# Altium PCB PCB1.PcbDoc
Units mil, origin at the board's own origin, x right, y up, seen from the top; angles counter-clockwise.
Board outline 1579.83 x 2288.5 mil, 2 copper layers (Top Layer, Bottom Layer); 80 components, 49 nets, 228 pads, 100 vias.
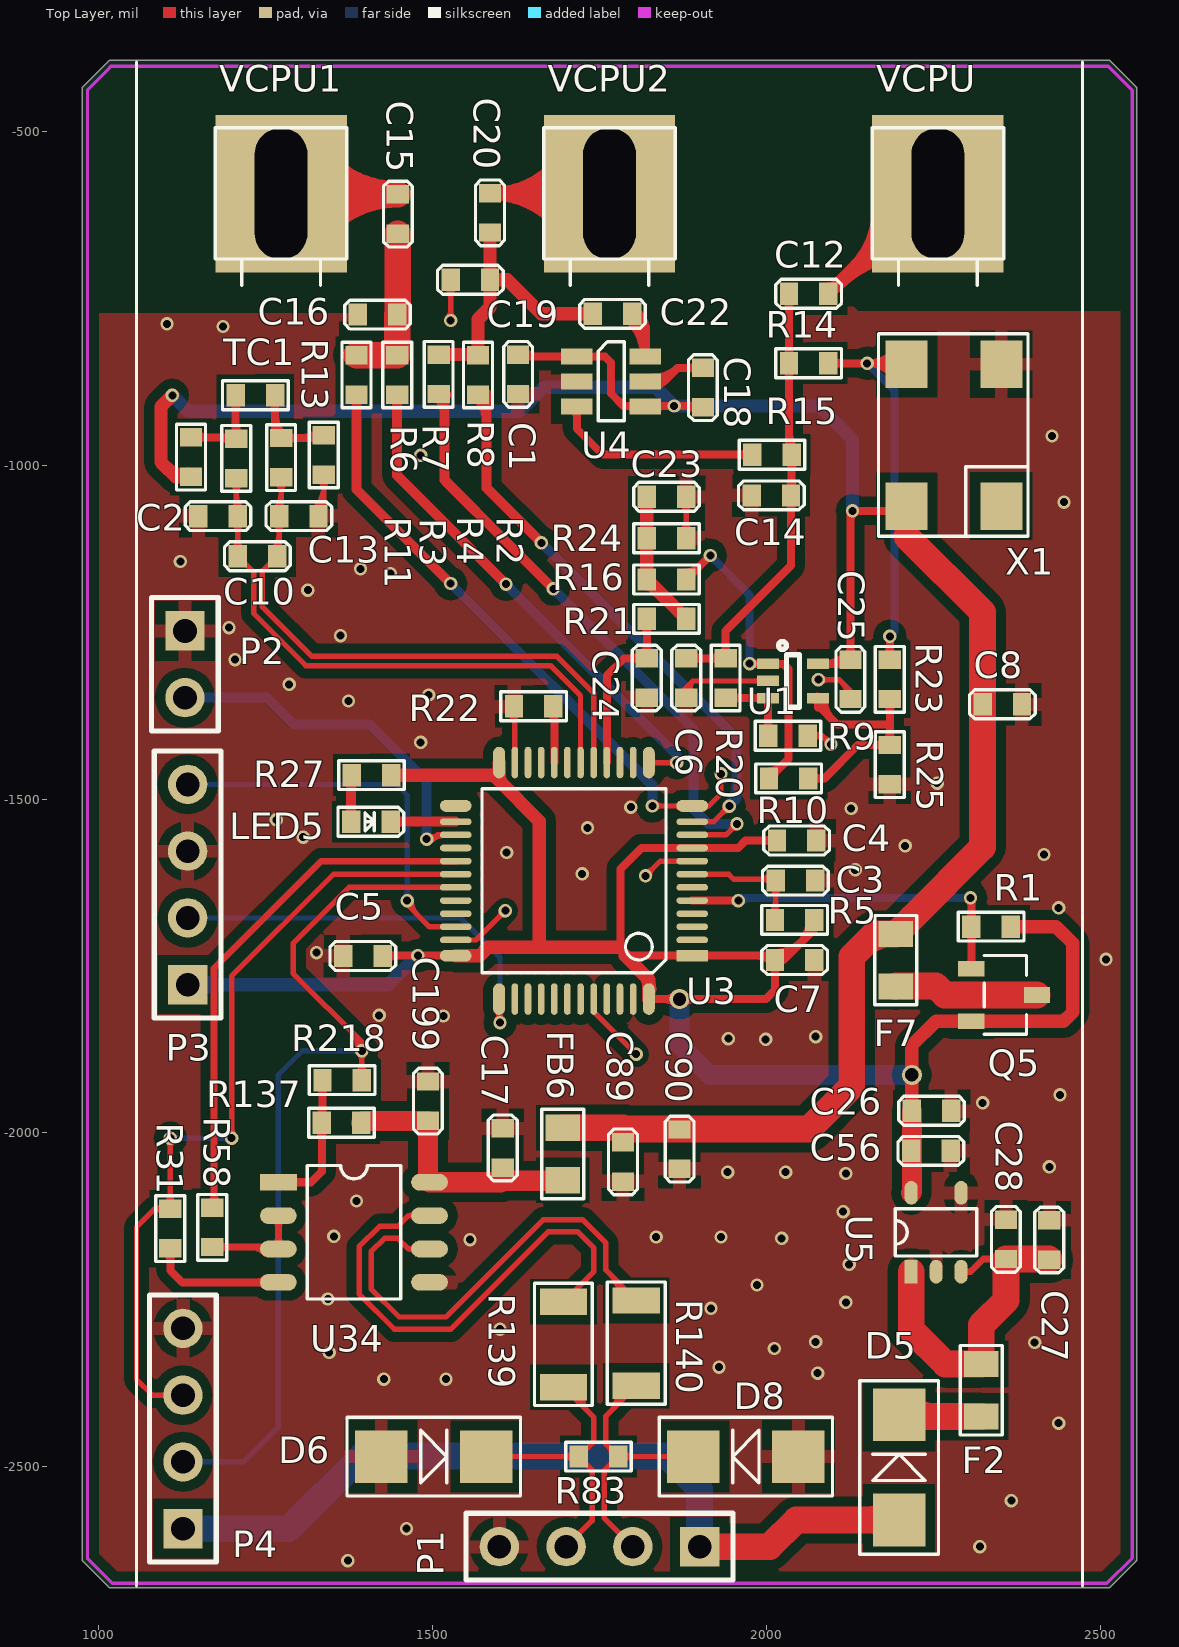
[diagram p0: Top Layer view]
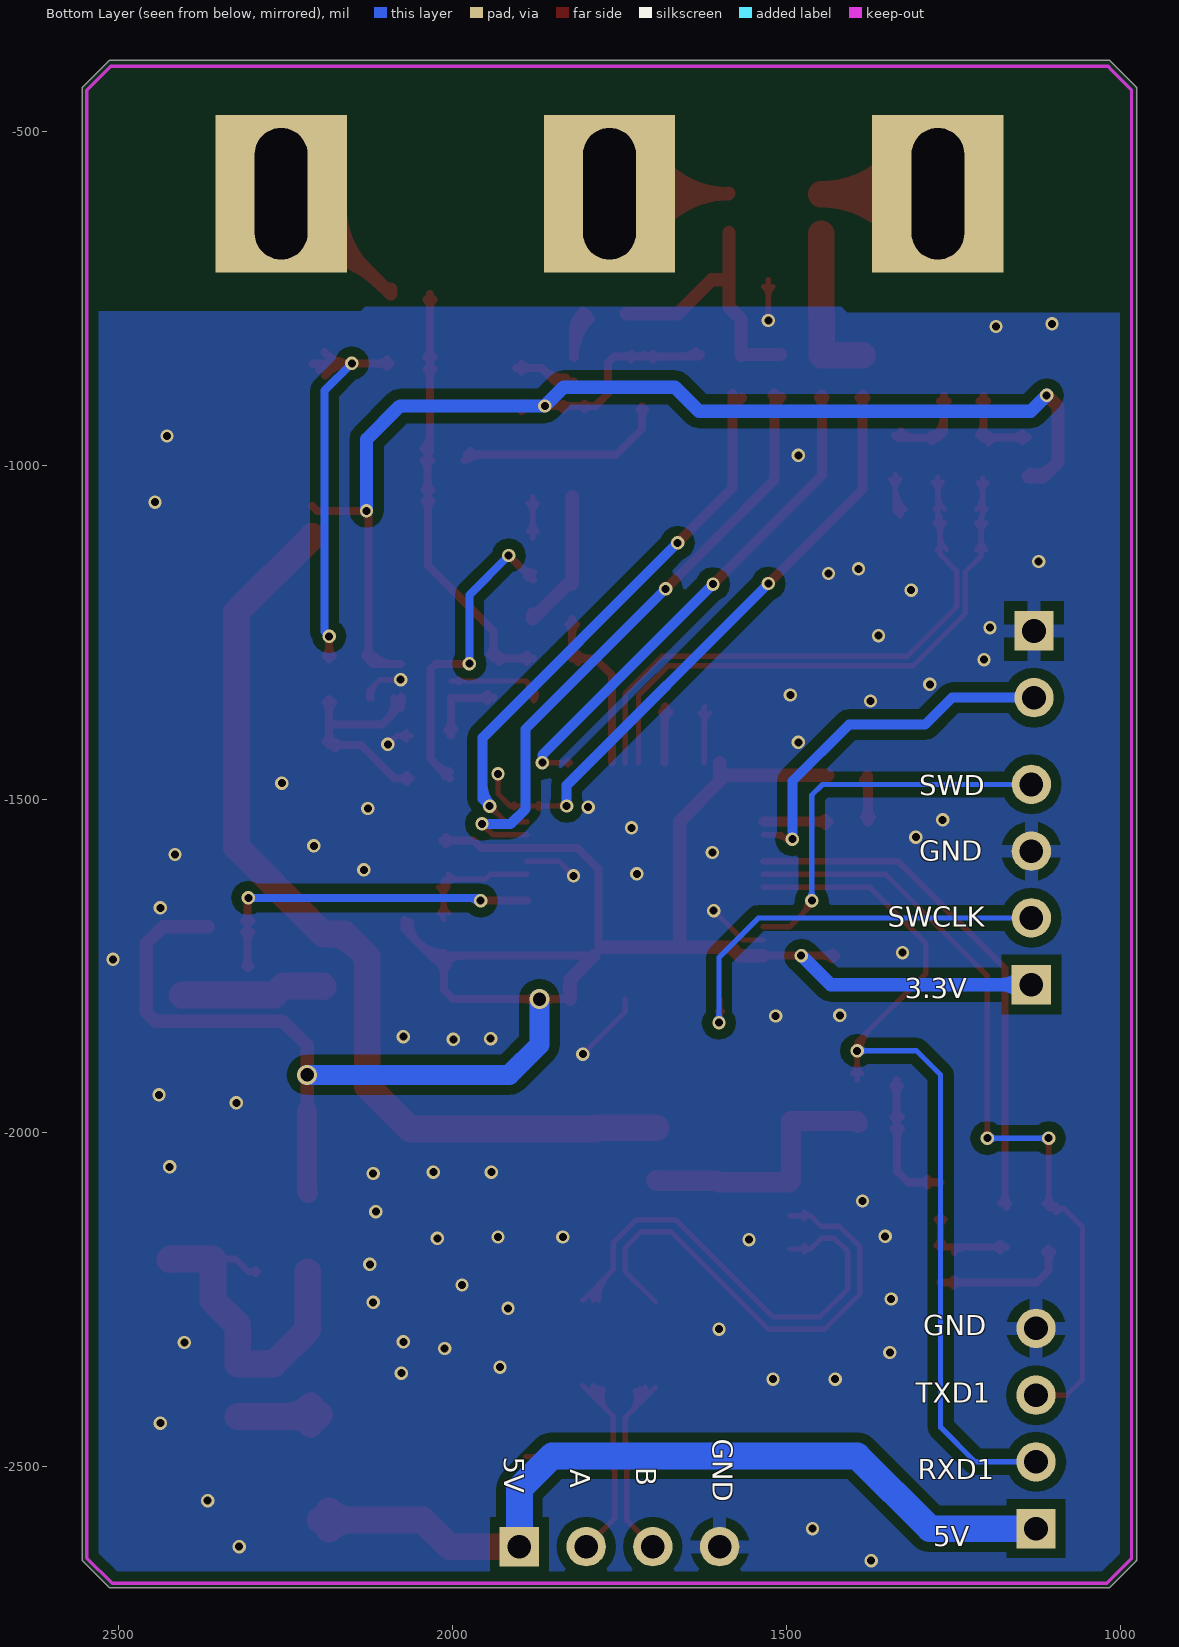
[diagram p1: Bottom Layer view, seen from below]

## Layer stack, top to bottom
Top Layer: signal copper 1.4
Dielectric: dielectric 12.6, FR-4, Dk 4.8
Bottom Layer: signal copper 1.4

## Board outline
975.11,-2639.63 ccw(c977.63,-2639.63) 975.85,-2641.41 1015.22,-2680.78 ccw(c1017,-2679) 1017,-2681.52 2513.06,-2681.52 ccw(c2513.06,-2679) 2514.84,-2680.78 2554.21,-2641.41 ccw(c2552.43,-2639.63) 2554.95,-2639.63 2554.95,-434.9 ccw(c2552.43,-434.9) 2554.21,-433.13 2514.84,-393.76 ccw(c2513.06,-395.53) 2513.06,-393.02 1017,-393.02 ccw(c1017,-395.53) 1015.22,-393.76 975.85,-433.13 ccw(c977.63,-434.9) 975.11,-434.9

## Design rules (kind name [scope] priority, off if disabled: settings)
Clearance Clearance_2 [InNet('+5V')  And InPolygon] p1: gap=12
Clearance Clearance_1 [InPoly And InNet(AGND)] p2: gap=15
Clearance [All] p3: gap=5
DiffPairsRouting [All] p1: maxlimit=10 minlimit=10 mostfreqgap=10 maxuncoupledlength=500
MinimumSolderMaskSliver [All] p1: minsoldermaskwidth=1
PolygonConnect PolygonConnect_1 [IsVia] p1: connectstyle=Direct reliefconductorwidth=10 reliefentries=4 polygonreliefangle="90 Angle"
PolygonConnect [All] p2: connectstyle=Relief reliefconductorwidth=20 reliefentries=4 polygonreliefangle="90 Angle"
RoutingVias [All] p1: holewidth=28 width=50 viastyle="Through Hole" minholewidth=28 minwidth=50 maxholewidth=28 maxwidth=50
SilkToSilkClearance [All] p1: silktosilkclearance=1
SilkscreenOverComponentPads [All] p1: minsilkscreentomaskgap=1
SolderMaskExpansion [All] p1: expansion=4
Width [All] p1: maxlimit=200 minlimit=6 preferedwidth=10
24 further rules are at their usual default settings.

## Classes and differential pairs
component class Sheet2: C1 C2 C6 C8 C10 C12 C13 C14 C15 C16 C18 C19 C20 C22 C23 C24 C25 R2 R3 R4 R6 R7 R8 R9 R10 R11 R13 R14 R15 R16 R20 R21 R23 R24 R25 TC1 U1 U4 VCPU VCPU1 VCPU2 X1
differential pair 4852: +4852_P -4852_N
differential pair 485: +485_P -485_N

## Components (designator, comment, footprint, x,y, rotation, side; value= is the part's Value field where it differs from the comment)
C1 "0.1uF/25V" 0603C 1628,-893 r90 top
C2 "0.1uF/25V" 0603c 1208,-1076 r180 top
C3 "0.1uF/25V" 0603C 2073,-1622 r180 top
C4 "0.1uF/25V" 0603C 2075,-1562 r180 top
C5 "0.1uF/25V" 0603C 1366,-1735 r0 top
C6 "0.01uF/25V" 0603C 1880,-1289 r270 top
C7 "0.1uF/25V" 0603C 2072,-1741 r180 top
C8 "0.1uF/25V" 0603C 2324,-1358 r0 top
C10 "1uF" 0603c 1208,-1136 r0 top
C12 "220pF" 0603C 2093,-743 r180 top
C13 "0.1uF/25V" 0603c 1270,-1076 r0 top
C14 "0.1uF/25V" 0603C 2037,-1045 r180 top
C15 "10pF" 0603C 1448,-653 r90 top
C16 "100PF" 0603C 1447,-774 r180 top
C17 "10uF/25V" 0603C 1605,-1993 r270 top
C18 "0.1uF/25V" 0603C 1905,-913 r90 top
C19 "15pF" 0603C 1586,-722 r180 top
C20 "4700pF" 0603C 1586,-592 r270 top
C22 "220pF" 0603C 1740,-773 r0 top
C23 "0.01uF/25V" 0603C 1880,-1047 r180 top
C24 "0.01uF/25V" 0603C 1821,-1348 r90 top
C25 "0.1uF/25V" 0603C 2126,-1350 r90 top
C26 "10uF/25V" 0603C 2277,-1967 r180 top
C27 "10uF/25V" 0603C 2424,-2131 r270 top
C28 "0.1uF/25V" 0603C 2359,-2189 r90 top
C56 "0.1uF/25V" 0603C 2217,-2027 r0 top
C89 "10uF/25V" 0603C 1785.23,-2073 r90 top
C90 "0.01uF" 0603C 1870,-2054 r90 top
C199 "0.01uF" 0603C 1493,-1923 r270 top
D5 "SS24" SMA 2199,-2580 r90 top
D6 "SMAJ6.5CA" SMA 1423,-2485 r0 top
D8 "SMAJ6.5CA" SMA 2048,-2485 r180 top
F2 "SMD0805P050" 0805R 2322,-2425 r90 top
F7 "SMD0805P020" 0805R 2194,-1702 r270 top
FB6 "JWWBW2012 M600HT" 0805CZ 1695,-2071 r90 top
LED5 "LED" 0603LED 1378,-1534 r0 top
P1 "Header 4" HDR1X4 1900,-2620 r180 top
P2 "Header 2" HDR1X2 1129,-1248 r270 top
P3 "Header 4" HDR1X4 1133,-1778 r90 top locked
P4 "Header 4" HDR1X4 1126,-2593 r90 top
Q5 "si2343" SOT23-3 2307,-1754 r180 top
R1 "10k" 0603r 2366.31,-1691 r180 top
R2 "499/1%" 0603r 1337,-955 r270 top
R3 "499/1%" 0603r 1206,-1019 r90 top
R4 "499/1%" 0603r 1273,-1018 r90 top
R5 "10K" 0603R 2072,-1681 r180 top
R6 "510" 0603R 1447,-894 r90 top
R7 "100/NC" 0603R 1509,-893 r90 top
R8 "510/NC" 0603R 1568,-894 r90 top
R9 "150K" 0603R 2062,-1405 r180 top
R10 "100K" 0603R 2063,-1469 r180 top
R11 "499/1%" 0603r 1138,-958 r270 top
R13 "100" 0603R 1386,-894 r90 top
R14 "150K" 0603r 2093,-847 r180 top
R15 "68K" 0603r 2038,-984 r180 top
R16 "100" 0603R 1880,-1171 r180 top
R20 "51K" 0603R 1939,-1348 r90 top
R21 "100" 0603R 1880,-1230 r180 top
R22 "10K" 0603R 1681,-1361 r180 top
R23 "51K" 0603R 2185,-1350 r90 top
R24 "150K" 0603R 1880,-1109 r180 top
R25 "51K" 0603R 2185,-1478 r90 top
R27 "1K" 0603R 1379,-1464 r0 top
R31 "1K" 0603R 1107,-2173 r90 top
R58 "1K" 0603R 1170,-2171 r90 top
R83 "100" 0603R 1778,-2485 r180 top
R137 "100k" 0603R 1334,-1985 r0 top
R139 "10" 1206R 1696,-2381 r90 top
R140 "10" 1206R 1805,-2379 r90 top
R218 "1K" 0603R 1335,-1921 r0 top
TC1 "THERMOCOUPLE" 0603R 1205,-895 r0 top
U1 "OPA837IDCKR" SC70-5 2040,-1323 r0 top
U3 "STM32F103C8T6" TQFP-48 1889,-1711 r180 top
U4 "ltc5507es6" SOT23-6 1716,-837 r270 top
U5 "TLV70233DBVR" SOT23-5(DBV) 2217,-2208 r90 top
U34 "THVD1500" so-8 1269,-2074 r0 top
VCPU "VCPU" probe 2257,-593 r0 top locked
VCPU1 "VCPU" probe 1273,-593 r0 top locked
VCPU2 "VCPU" probe 1765,-593 r0 top locked
X1 "PXETCLJANF-80.000000" XTAL4TN_7050 2352,-1061 r90 top

## Footprints (in the part's own frame and the unit in brackets; to place one, negate y for a bottom-side part, rotate by r counter-clockwise, add the part's x,y. Pads: shape width x height; smd on the part's side, far side on the other; paste and mask are expansions set on the pad)
0603C [mm]
  rect 0.7x0.85 smd: 1(0,0) 2(1.5,0)
  silkscreen extent -0.5,-0.55 2,0.55
0603c [mm]
  rect 0.7x0.85 smd: 1(0,0) 2(1.5,0)
  silkscreen extent -0.5,-0.55 2,0.55
0603LED [mm]
  rect 0.7x0.85 smd: 1(0,0) 2(1.5,0)
  silkscreen extent -0.5,-0.55 2,0.55
0603r [mm]
  rect 0.7x0.85 smd: 1(0,0) 2(1.5,0)
  silkscreen extent -0.5,-0.55 2,0.55
0603R [mm]
  rect 0.7x0.85 smd: 1(0,0) 2(1.5,0)
  silkscreen extent -0.5,-0.55 2,0.55
0805CZ [mm]
  rect 1x1.3 smd: 1(0,0) 2(2,0)
  silkscreen extent -0.7,-0.8 2.7,0.8
0805R [mm]
  rect 1x1.3 smd: 1(0,0) 2(2,0)
  silkscreen extent -0.7,-0.8 2.7,0.8
1206R [mm]
  rect 1x1.8 smd: 1(0,0) 2(3.25,0)
  silkscreen extent -0.7,-1.1 3.95,1.1
HDR1X2 [mm] "Connector; Header; 2 Position"
  rect 1.5x1.5 hole 0.9: 1(0,0)
  round 1.5 hole 0.9: 2(2.54,0)
  silkscreen extent -1.27,-1.27 3.81,1.27
HDR1X4 [mm] "Connector; Header; 4 Position"
  rect 1.5x1.5 hole 0.9: 1(0,0)
  round 1.5 hole 0.9: 2(2.54,0) 3(5.08,0) 4(7.62,0)
  silkscreen extent -1.27,-1.27 8.89,1.27
probe [mm]
  rect 5x6 hole 2 slot 5 at 90 deg: 1(0,0)
SC70-5 [mm] "SC70 6-Leads, Body 2.0x1.25mm, Pitch 0.65mm"
  rect 0.85x0.4 smd mask+0.05: 1(-0.95,0.65) 2(-0.95,0) 3(-0.95,-0.65) 4(0.95,-0.65) 5(0.95,0.65)
  silkscreen extent -0.55,-1 0.25,1.5, body extent -0.63,-1 0.63,1, height 1.45
SMA [mm]
  rect 2x2 smd: 1(0,0) 2(4,0)
  silkscreen extent -1.3,-1.5 5.3,1.5
so-8 [mil]
  rect 55x25 smd: 1(0,0)
  oval 55x25 smd: 2(0,-50) 3(0,-100) 4(0,-150) 5(226.38,-150) 6(226.38,-100) 7(226.38,-50) 8(226.38,0)
  silkscreen extent 43,-175 183,25
SOT23-3 [mm]
  rect 1x0.6 smd: 1(0,0) 2(0,2) 3(-2.5,1)
  silkscreen extent -2.1,-0.5 -0.5,2.5
SOT23-5(DBV) [mm]
  rect 0.9x0.5 smd: 1(0,0)
  oval 0.9x0.5 smd: 2(0,-0.95) 3(0,-1.9) 4(3,-1.9) 5(3,0)
  silkscreen extent 0.6,-2.5 2.4,0.6
SOT23-6 [mm]
  rect 0.6x1.2 smd: 1(0,0) 2(0.95,0) 3(1.9,0) 4(1.9,2.6) 5(0.95,2.6) 6(0,2.6)
  silkscreen extent -0.56,0.81 2.44,1.8
TQFP-48 [mm]
  rect 1.2x0.45 smd: 1(0,0.6)
  oval 1.2x0.25 smd: 2(0,0) 3(0,-0.5) 4(0,-1) 5(0,-1.5) 6(0,-2) 7(0,-2.5) 8(0,-3) 9(0,-3.5) 10(0,-4) 11(0,-4.5) 26(9,-4.5) 27(9,-4) 28(9,-3.5) 29(9,-3) 30(9,-2.5) 31(9,-2) 32(9,-1.5) 33(9,-1) 34(9,-0.5) 35(9,0)
  oval 1.2x0.45 smd: 12(0,-5.1) 25(9,-5.1) 36(9,0.6)
  oval 0.45x1.2 smd: 13(1.65,-6.75) 24(7.35,-6.75) 37(7.35,2.25) 48(1.65,2.25)
  oval 0.25x1.2 smd: 14(2.25,-6.75) 15(2.75,-6.75) 16(3.25,-6.75) 17(3.75,-6.75) 18(4.25,-6.75) 19(4.75,-6.75) 20(5.25,-6.75) 21(5.75,-6.75) 22(6.25,-6.75) 23(6.75,-6.75) 38(6.75,2.25) 39(6.25,2.25) 40(5.75,2.25) 41(5.25,2.25) 42(4.75,2.25) 43(4.25,2.25) 44(3.75,2.25) 45(3.25,2.25) 46(2.75,2.25) 47(2.25,2.25)
  silkscreen extent 1,-5.75 8,1.25
XTAL4TN_7050 [mm]
  rect 1.8x1.6 smd: 1(0,0) 2(5.4,0) 3(5.4,3.6) 4(0,3.6)
  silkscreen extent -1.14,-1.02 6.55,4.67

## Part data
C1 C2 C3 C4 C5 C6 C7 C8 C10 C13 C15 C16 C23 C24 C25: library part CAP, "Capacitor"
C12 C14 C17 C18 C19 C20 C22 C89 C90 C199: library part C, "C"
C26 C27 C28 C56: library part Cap, "Capacitor"
D5: library part "Diode 1N4148", "High Conductance Fast Diode"
D6 D8: library part "DIODE S", "Schottky Diode"
F2: library part "Fuse 2", "Fuse"
F7: library part "Fuse 1", "Fuse"
FB6: library part FB
P1 P3 P4: "Header, 4-Pin"
P2: "Header, 2-Pin"
Q5: library part BUK92150-55A, "BUK92150-55A"
R1: library part Res1, "Resistor"
R2 R3 R4 R11 R27: library part RES1
R5 R6 R7 R8 R9 R13 R20 R22 R23 R25: library part Res3, "Resistor"
R10 R14 R15 R16 R21 R24 R31 R58 R83 R218: library part R, "R"
R137 R139 R140: library part RES2
U1: library part "OPA837 DCK"
U3: "STM32 ARM-based 32-bit MCU with 64 Kbytes Flash, 48-pin LQFP, Industrial Temperature"
U5: library part TLV70230DBVR
U34: library part SN65HVD06D
VCPU VCPU1 VCPU2: library part T_POINT_R
X1: library part XTAL4S

## Via types
v1: diameter 20, hole 12, Top Layer to Bottom Layer, tented both sides, 98 vias
v2: diameter 30, hole 20, Top Layer to Bottom Layer, tented both sides, 2 vias

## Nets (pads, with @x,y where several pads share a name; then routed paths per layer and width w, separated by ;. In a path a pad name is that pad's centre, name@x,y a point inside that pad or via, vN(x,y) a via of type N, cw(c..) or ccw(c..) an arc to the next point about the centre after c; other vN are vias at no path point)
485_3.3V1: C17.2 C199.2 FB6.1 R137.2 U34.8 | length 395
  Top Layer w30: R137.2 1396,-1982.06 C199.2 1493,-2071.62 U34.8 1602.74,-2074 1605,-2071.74 1694.26,-2071.74 FB6.1
485_EN1: R58.2 U3.29 | length 821.5
  Top Layer w10: R58.2@1166.74,-2105.74 ccw(c1152.78,-2091.78) 1172.53,-2091.78 ; R58.2 1172.53,-2109.42 1172.53,-1753.47 1333.11,-1592.89 U3.29 ; 1172.53,-2089.72 ccw(c1195.17,-2089.72) R58.2@1179.16,-2105.74
485_N: D6.2 P1.3 R83.2 R139.1 | length 551.9
  Top Layer w8: D6.2 R83.2 ; R139.1 1741.5,-2426.5 1741.5,-2462.44 R83.2 ; P1.3 1739,-2581 1739,-2505.06 R83.2 ; R139.1@1711.45,-2380.89 ccw(c1729.34,-2387.41) 1715.88,-2400.88 ; R83.2@1712.03,-2491.92 ccw(c1695.34,-2508.61) 1695.34,-2485 ccw(c1695.34,-2461.39) R83.2@1712.03,-2478.08 ; R139.1@1718.97,-2383.63 ccw(c1742.35,-2392.16) 1724.75,-2409.75 ; R139.1@1726.48,-2386.37 ccw(c1755.35,-2396.9) 1733.62,-2418.62
485_P: D8.2 P1.2 R83.1 R140.1 | length 570.7
  Top Layer w8: 1759.5,-2462 1759.5,-2449 ; 1760.98,-2467.98 ccw(c1772.66,-2456.3) R83.1@1776.01,-2472.47 ; 1763.39,-2470.39 cw(c1751.74,-2482.05) R83.1@1768.22,-2482.05 ; 1767.38,-2416.62 ccw(c1745.65,-2394.9) R140.1@1774.52,-2384.37 ; 1776.25,-2407.75 ccw(c1758.65,-2390.16) R140.1@1782.03,-2381.63 ; R83.1@1784.92,-2491.92 cw(c1801.61,-2508.61) 1801.61,-2485 cw(c1801.61,-2461.39) R83.1@1784.92,-2478.08 ; 1785.12,-2398.88 ccw(c1771.66,-2385.41) R140.1@1789.55,-2378.89 ; P1.2 1757,-2577 1757,-2506 R83.1 ; R140.1 1759.5,-2424.5 1759.5,-2449 ; D8.2 R83.1 ; 1759.5,-2449 1759.5,-2466.5 R83.1
4852_N: R140.2 U34.6 | length 802.9
  Top Layer w8: U34.6@1473.48,-2178.97 ccw(c1463.77,-2185.97) 1463.77,-2174 ; U34.6@1473.48,-2169.03 cw(c1463.77,-2162.03) 1463.77,-2174 ; U34.6 1463.77,-2174 ; 1765.2,-2211.25 cw(c1725.68,-2250.76) R140.2@1781.57,-2251.01 ; 1778.77,-2224.82 cw(c1752.7,-2250.88) R140.2@1789.57,-2251.05 ; R140.2 1759.5,-2205.55 1759.5,-2165.04 1724.46,-2130 1666,-2130 1520,-2276 1450,-2276 1408,-2234 1408,-2178 1428,-2158 1447.77,-2158 1463.77,-2174
4852_P: R139.2 U34.7 | length 761.5
  Top Layer w8: U34.7@1473.48,-2128.97 ccw(c1463.77,-2135.97) 1463.77,-2124 ; U34.7@1473.48,-2119.03 cw(c1463.77,-2112.03) 1463.77,-2124 ; U34.7 1463.77,-2124 ; R139.2 1741.5,-2207.55 1741.5,-2172.5 1717,-2148 1673.46,-2148 1527.46,-2294 1442.54,-2294 1390,-2241.46 1390,-2170.54 1420.54,-2140 1447.77,-2140 1463.77,-2124
AGND: C1.1 C2.2 C3.1 C4.1 C5.1 C6.2 C7.1 C8.2 C13.2 C14.2 C16.2 C17.1 C19.2 C23.1 C24.1 C25.1 C26.1 C27.1 C28.2 C56.2 C89.1 C90.1 C199.1 D6.1 D8.1 P1.4 P2.1 P3.3 P4.4 R2.2 R9.1 R22.2 R24.1 R25.1 U1.2 U3.8 U3.23 U3.35 U3.44 U3.47 U4.2 U5.2 U5.4 U34.5 X1.2 | length 1364.3
  Top Layer w8: C13.2@1322.14,-1066.13 ccw(c1286.26,-1030.26) 1337,-1030.26 ; C13.2@1327.8,-1071.79 ccw(c1305.58,-1049.57) 1337,-1049.57 ; C13.2 1337,-1068.06 R2.2 ; R2.2@1330.08,-1020.97 cw(c1313.39,-1037.66) 1337,-1037.66 cw(c1360.61,-1037.66) R2.2@1343.92,-1020.97 ; C19.2@1520.03,-731.87 cw(c1503.34,-748.56) 1526.94,-748.56 cw(c1550.55,-748.56) C19.2@1533.86,-731.87 ; v1@1522.7,-778.7 ccw(c1512.46,-768.46) 1526.94,-768.46 ccw(c1541.43,-768.46) v1@1531.19,-778.7 ; C19.2 v1(1526.94,-782.94) v1@1527,-783 ; 1559,-1711 U3.35 1565,-1711 v1(1609,-1667) ; v1@1603,-1667 cw(c1588.51,-1667) 1598.76,-1677.24 cw(c1609,-1687.49) v1@1609,-1673 ; R22.2@1615.03,-1370.87 cw(c1595.18,-1390.72) 1623.25,-1390.72 ; R22.2 1623.25,-1362.31 U3.23 ; 1623.25,-1384.41 cw(c1642.4,-1384.41) R22.2@1628.86,-1370.87 ; U3.44 1741.36,-1818.36 v1(1805,-1882) ; v1@1799,-1882 ccw(c1784.51,-1882) 1794.76,-1871.76 ccw(c1805,-1861.51) v1@1805,-1876 ; v1(1819,-1615) 1841.11,-1592.89 U3.8 ; v1@1819,-1609 ccw(c1819,-1594.51) 1829.24,-1604.76 ccw(c1839.49,-1615) v1@1825,-1615 ; R24.1@1873.08,-1099.13 ccw(c1856.39,-1082.44) 1880,-1082.44 ccw(c1903.61,-1082.44) R24.1@1886.92,-1099.13 ; C23.1@1873.08,-1056.87 cw(c1856.39,-1073.56) 1880,-1073.56 cw(c1903.61,-1073.56) C23.1@1886.92,-1056.87 ; C6.2@1876.02,-1339.12 ccw(c1873.3,-1333) 1880,-1333 ; C6.2@1878.52,-1352.42 cw(c1887.63,-1343.45) C6.2@1878.59,-1334.41 ; C6.2 1880,-1333 ; R24.1 C23.1 ; C6.2@1883.98,-1339.12 cw(c1886.7,-1333) 1880,-1333 ; C6.2@1884.22,-1346.81 cw(c1893.39,-1337.79) 1884.3,-1328.7 ; C6.2@1889.92,-1341.2 cw(c1899.14,-1332.14) 1890,-1323 ; U1.2@1991,-1325.74 ccw(c1984.39,-1332.35) 1984.39,-1323 ccw(c1984.39,-1313.65) U1.2@1991,-1320.26 ; U1.2 1890,-1323 ; R9.1 2084,-1405 ; R9.1@2069.26,-1411.55 cw(c2084,-1424.85) 2084,-1405 ; R9.1@2069.26,-1398.45 ccw(c2084,-1385.15) 2084,-1405 ; v1(2078,-1321) 2109,-1321 2126,-1338 C25.1 ; v1@2082.24,-1325.24 cw(c2092.49,-1335.49) 2092.49,-1321 cw(c2092.49,-1306.51) v1@2082.24,-1316.76 ; v1@2091,-1418 ccw(c2076.51,-1418) 2086.76,-1407.76 ccw(c2097,-1397.51) v1@2097,-1412 ; v1(2097,-1418) 2084,-1405 ; 2112.92,-1324.92 cw(c2092.08,-1345.76) C25.1@2121.28,-1349.76 ; 1880,-1333 1890,-1323
  other v1: 1373,-2641 2320,-2620 1461,-2593 2367,-2551 2438,-2435 1427,-2369 1520,-2369 2077,-2360 1929,-2351 1345,-2329 2012,-2323 2402,-2314 2074,-2313 1601,-2294 1917,-2263 2119,-2254 1343,-2249 1986,-2228 2124,-2197 1556,-2160 2023,-2158 1835,-2156 1932,-2156 1352,-2155 2115,-2118 1386,-2102 2119,-2061 1942,-2059 2029,-2059 2424,-2051 2324,-1955 2440,-1943 1999,-1860 1943,-1859 2074,-1856 1516,-1825 1420,-1824 2509,-1740 1326,-1730 2438,-1663 1724,-1612 2133,-1606 2416,-1583 1611,-1580 2208,-1570 1306,-1557.01 1732,-1543 1266,-1531 2127,-1514 1797,-1512 2256,-1476 1482,-1415 1374,-1353 1494,-1344 1285,-1328 1204,-1291 1362,-1255 1195,-1243 1313,-1187 1437,-1162 1392,-1155 1122,-1144 2446,-1055 1482,-985 2428,-956 1186,-792 1102,-788
FB_B: C15.1 C16.1 R6.2 R13.2 | length 243.4
  Top Layer w40: R13.2 R6.2 C16.1 1448,-773 C15.1
FDR_ADC_A: C24.2 R21.2 U3.16 | length 348.5
  Top Layer w12: U3.16 1761.05,-1360 1761.05,-1314.95 1787.06,-1288.94 C24.2 C24.2 R21.2 ; C24.2@1812.55,-1294.45 ccw(c1799.27,-1307.73) 1799.27,-1288.94 ccw(c1799.27,-1270.16) C24.2@1812.55,-1283.44 ; R21.2@1815.44,-1238.45 cw(c1802.16,-1251.73) 1820.94,-1251.73 cw(c1839.73,-1251.73) R21.2@1826.45,-1238.45 ; C24.2@1815.5,-1283.44 ccw(c1802.35,-1270.3) 1820.94,-1270.3 ; 1820.94,-1270.03 ccw(c1839.91,-1270.03) C24.2@1826.5,-1283.44
NetC3_2: C3.2 R5.2 U3.7 | length 299.5
  Top Layer w8: U3.7 1943.57,-1612.57 1951,-1620 2011.94,-1620 C3.2 2013.94,-1680 R5.2 ; 1988.03,-1620 ccw(c1988.03,-1593.14) C3.2@2007.03,-1612.13 ; 1992.64,-1620 cw(c1992.64,-1640.36) C3.2@2007.03,-1625.96 ; R5.2@2006.03,-1671.13 ccw(c1986.92,-1652.02) 2013.94,-1652.02 ; C3.2@2007.03,-1631.87 cw(c1990.34,-1648.56) 2013.94,-1648.56 cw(c2037.55,-1648.56) C3.2@2020.86,-1631.87 ; 2013.94,-1656.85 ccw(c2034.14,-1656.85) R5.2@2019.86,-1671.13
NetC12_1: C12.1 VCPU.1 | length 792.4
  Top Layer w20: C12.1 2243,-593 VCPU.1 ; C12.1@2093,-736.27 ccw(c2093,-720.01) C12.1@2104.49,-731.51 ; C12.1@2105.39,-730.61 cw(c2228.85,-854.08) VCPU.1@2249.07,-680.65 ; 2129.87,-706.13 ccw(c2036.42,-612.68) VCPU.1@2168.57,-612.68 ; 2134.61,-701.39 cw(c2234.95,-801.74) VCPU.1@2251.39,-660.78 ; VCPU.1@2163.83,-672.17 cw(c2241.06,-749.4) VCPU.1@2253.71,-640.92 ; VCPU.1@2164.01,-671.99 ccw(c2104.7,-612.68) VCPU.1@2188.57,-612.68
NetC15_2: C15.2 VCPU1.1 | length 438.3
  Top Layer w40: VCPU1.1 1273.94,-593.94 C15.2 ; VCPU1.1@1331.06,-645.72 cw(c1447.99,-751.87) C15.2 cw(c1447.99,-439.78) VCPU1.1@1332,-541.34
NetC18_2: C18.2 U4.5 | length 206.4
  Top Layer w12: U4.5 1846.6,-874.4 1867.06,-853.94 ; U4.5@1830.01,-880.59 ccw(c1830.63,-857.01) 1847.31,-873.69 ; U4.5@1830.33,-868.59 ccw(c1831.65,-818.55) 1867.05,-853.95 ; U4.5@1834.28,-878.51 cw(c1844.2,-888.43) 1844.2,-874.4 cw(c1844.2,-860.37) U4.5@1834.28,-870.29 ; C18.2@1896.55,-859.45 ccw(c1883.27,-872.73) 1883.27,-853.94 ccw(c1883.27,-835.16) C18.2@1896.55,-848.44 ; C18.2 1867.06,-853.94
NetC19_1: C19.1 C20.2 C22.1 R7.2 R8.2 | length 425.9
  Top Layer w20: R7.2 1567,-833.94 R8.2 1568,-781 1586,-763 C19.1 ; C20.2 C19.1 ; C22.1 1663,-773 1612,-722 C19.1
NetC20_1: C20.1 VCPU2.1 | length 620.8
  Top Layer w20: C20.1 C20.1@1587,-593 ; VCPU2.1@1694.53,-646.42 ccw(c1587.01,-727.93) C20.1@1587.01,-593 ; VCPU2.1@1694.53,-539.58 cw(c1587.01,-458.07) C20.1@1587.01,-593 ; VCPU2.1@1710.47,-634.34 ccw(c1627.27,-697.41) 1627.27,-593 ccw(c1627.27,-488.59) VCPU2.1@1710.47,-551.66 ; VCPU2.1 C20.1@1587,-593
NetC22_2: C22.2 U4.6 | length 188.4
  Top Layer w15: C22.2@1794.61,-780.39 cw(c1737.28,-837.72) U4.6@1818.36,-837.72 ; C22.2@1799.06,-782.23 cw(c1799.06,-804.52) 1814.82,-788.76 ; C22.2 1818.36,-792.31 U4.6 ; C22.2@1805.22,-769.79 cw(c1773.5,-801.51) 1818.36,-801.51
NetC23_2: C23.2 R16.2 R21.1 R24.2 | length 233.1
  Top Layer w20: R16.2@1820.94,-1177.73 cw(c1820.94,-1193.99) R16.2@1832.44,-1182.49 ; C23.2 R24.2 R16.2 R21.1 R21.1 ; R21.1@1868.41,-1218.47 ccw(c1880,-1206.88) R21.1@1880,-1223.27
NetC27_2: C27.2 C28.1 F2.2 U5.1 U5.3 | length 578
  Top Layer w10: U5.3 2306,-2208 2325,-2189 C28.1 ; U5.3@2295.23,-2211.42 cw(c2303.49,-2219.69) 2303.49,-2208 cw(c2303.49,-2196.31) U5.3@2295.23,-2204.58 ; C28.1@2349.84,-2195.21 ccw(c2334.85,-2210.2) 2334.85,-2189 ccw(c2334.85,-2167.8) C28.1@2349.84,-2182.79
  Top Layer w40: U5.1 2217,-2295 2268.26,-2346.26 F2.2 2322,-2288 2359,-2251 C28.1 2422.94,-2189 C27.2
NetD5_2: D5.2 F2.1 | length 197.5
  Top Layer w40: D5.2 2201.48,-2425 F2.1 ; D5.2@2212.7,-2436.22 cw(c2239.78,-2463.3) 2239.78,-2425 ; D5.2@2212.7,-2408.82 ccw(c2251.75,-2369.77) 2251.75,-2425
NetF7_2: F7.2 Q5.3 | length 217.3
  Top Layer w40: F7.2 2194.74,-1780 2254,-1780 2267.37,-1793.37 Q5.3
NetLED5_1: LED5.1 R27.1 | length 108.8
  Top Layer w15: LED5.1@1373.56,-1526.61 ccw(c1362.84,-1515.89) 1378,-1515.89 ccw(c1393.16,-1515.89) LED5.1@1382.44,-1526.61 ; LED5.1 1378,-1465 R27.1 ; 1378,-1484.53 cw(c1396.57,-1484.53) R27.1@1383.44,-1471.39
NetLED5_2: LED5.2 U3.26 | length 121.5
  Top Layer w15: LED5.2 1437.22,-1533.83 U3.26 ; LED5.2@1441.5,-1538.44 cw(c1452.62,-1549.56) 1452.62,-1533.83 ; LED5.2@1441.5,-1529.56 ccw(c1451.81,-1519.24) 1451.81,-1533.83
NetP2_2: P2.2 U3.27 | length 592.9
  Top Layer w8: v1(1491,-1560) 1501,-1560 1507.48,-1553.52 ; v1@1494.24,-1554.95 ccw(c1499.97,-1546.01) 1507.48,-1553.52 ; v1@1499.91,-1561.09 cw(c1515.97,-1577.15) U3.27@1515.97,-1554.44 ; 1503.24,-1557.76 cw(c1512.39,-1566.92) U3.27@1515.73,-1554.41 ; U3.27 1507.48,-1553.52
  Bottom Layer w15: P2.2 1252,-1348 1292,-1388 1406,-1388 1491,-1473 v1(1491,-1560)
NetR2_1: R2.1 R4.2 TC1.2 | length 248.4
  Top Layer w12: TC1.2@1258.55,-903.45 cw(c1245.27,-916.73) 1264.06,-916.73 cw(c1282.84,-916.73) TC1.2@1269.56,-903.45 ; 1264.06,-925.7 ccw(c1303.29,-925.7) R4.2@1275.55,-953.44 ; TC1.2 1264.06,-950 R4.2 1333.06,-958.94 R2.1 ; R4.2@1281.45,-964.45 cw(c1294.73,-977.73) 1294.73,-958.94 cw(c1294.73,-940.16) R4.2@1281.45,-953.44 ; 1305.74,-958.94 ccw(c1305.74,-926.69) R2.1@1328.55,-949.5
NetR3_2: R3.2 R11.1 TC1.1 | length 250.8
  Top Layer w12: R11.1 1204.06,-958 R3.2@1205,-958.94 ; R11.1@1146.45,-963.5 cw(c1159.73,-976.78) 1159.73,-958 cw(c1159.73,-939.22) R11.1@1146.45,-952.5 ; 1179.57,-958 cw(c1179.57,-983.42) R3.2@1197.55,-965.45 ; 1188.96,-958 ccw(c1188.96,-945.86) R3.2@1197.55,-954.44 ; TC1.1@1199.5,-903.45 cw(c1186.22,-916.73) 1205,-916.73 cw(c1223.78,-916.73) TC1.1@1210.5,-903.45 ; R3.2@1200.5,-954.44 ccw(c1189.63,-943.58) 1205,-943.58 ; 1205,-938.75 ccw(c1227.2,-938.75) R3.2@1211.5,-954.44 ; TC1.1 R3.2@1205,-958.94 ; R3.2 R3.2@1205,-958.94
NetR9_2: R9.2 R20.1 U1.3 | length 179.4
  Top Layer w12: R20.1 1939.59,-1348.59 U1.3 2002.6,-1404.65 R9.2 ; R20.1@1947.45,-1353.5 cw(c1959.31,-1365.36) 1959.31,-1348.59 ; R20.1@1947.45,-1342.5 ccw(c1962.16,-1327.79) 1962.16,-1348.59 ; R9.2@1997.44,-1396.55 ccw(c1985,-1384.1) 2002.6,-1384.1 ; 2002.6,-1382.43 ccw(c2022.56,-1382.43) R9.2@2008.45,-1396.55
NetR10_1: R10.1 R23.1 R25.2 U1.4 | length 526.5
  Top Layer w12: R10.1 2087,-1469 2137.06,-1418.94 R25.2 2185,-1388 ; R10.1@2068.5,-1474.5 cw(c2081.78,-1487.78) 2081.78,-1469 cw(c2081.78,-1450.22) R10.1@2068.5,-1463.5 ; U1.4@2076.43,-1346.15 ccw(c2093.84,-1350.47) 2081.16,-1363.16 ; 2077.4,-1362.57 cw(c2089.99,-1362.57) U1.4@2086.74,-1350.4 ; U1.4 2077.4,-1359.4 2106,-1388 2185,-1388 ; U1.4@2088.08,-1349.04 ccw(c2117.88,-1356.45) 2096.16,-1378.16 ; R25.2@2176.55,-1424.45 ccw(c2163.27,-1437.73) 2163.27,-1418.94 ccw(c2163.27,-1400.16) R25.2@2176.55,-1413.44 ; R25.2@2179.5,-1413.44 ccw(c2166.22,-1400.16) 2185,-1400.16 ccw(c2203.78,-1400.16) R25.2@2190.5,-1413.44 ; R23.1@2179.5,-1355.5 cw(c2166.22,-1368.78) 2185,-1368.78 cw(c2203.78,-1368.78) R23.1@2190.5,-1355.5 ; R23.1 2185,-1388
NetR10_2: R10.2 R16.1 U1.1 | length 542.4
  Top Layer w12: R16.1 v1(1916,-1135) ; R16.1@1880,-1160.27 ccw(c1880,-1134.36) 1898.32,-1152.68 ; R16.1@1887.78,-1168.05 cw(c1899.43,-1168.05) R16.1@1891.19,-1159.81 ; v1(1975,-1297) 1975.41,-1297.41 U1.1 2025.41,-1297.41 2033,-1305 2033,-1439.94 R10.2 ; v1@1977.83,-1294.17 ccw(c1985.65,-1286.35) 1985.65,-1297.41 ; R10.2@2003.94,-1458.27 ccw(c2003.94,-1432.36) 2022.27,-1450.68 ; R10.2@2011.72,-1466.05 cw(c2023.38,-1466.05) R10.2@2015.14,-1457.81
  Bottom Layer w12: v1(1916,-1135) 1975,-1194 v1(1975,-1297)
NetR15_2: R15.2 U4.3 | length 366.6
  Top Layer w12: U4.3@1711.89,-915.91 cw(c1701.97,-925.83) 1716,-925.83 cw(c1730.03,-925.83) U4.3@1720.11,-915.91 ; U4.3 1716,-945 1755,-984 R15.2 ; R15.2@1973.44,-989.5 ccw(c1960.16,-1002.78) 1960.16,-984 ccw(c1960.16,-965.22) R15.2@1973.44,-978.5 ; R15.2@1980,-991.06 R15.2@1981.94,-993
NetR22_1: R22.1 U3.20 | length 114.3
  Top Layer w12: R22.1@1675.5,-1369.45 cw(c1659.06,-1385.89) 1682.31,-1385.89 ; R22.1 1682.31,-1362.31 U3.20 ; 1682.31,-1379.58 cw(c1696.63,-1379.58) R22.1@1686.5,-1369.45
NetR31_1: R31.1 U34.4 | length 273.6
  Top Layer w12: R31.1@1101.5,-2178.5 cw(c1088.22,-2191.78) 1107,-2191.78 cw(c1125.78,-2191.78) R31.1@1112.5,-2178.5 ; R31.1 1107,-2206 ; 1119,-2218 1107,-2206 ; U34.4@1249.4,-2228.6 ccw(c1238.31,-2239.69) 1238.31,-2224 ccw(c1238.31,-2208.31) U34.4@1249.4,-2219.4 ; U34.4 1125,-2224 1107,-2206
NetR58_1: R58.1 U34.2 U34.3 | length 260.9
  Top Layer w10: R58.1 U34.3@1266,-2171 ; R58.1@1179.16,-2177.21 cw(c1194.15,-2192.2) 1194.15,-2171 cw(c1194.15,-2149.8) R58.1@1179.16,-2164.79 ; 1228.65,-2171 cw(c1228.65,-2199.35) U34.3@1248.7,-2179.3 ; U34.3@1263.7,-2168.7 ccw(c1250.89,-2155.89) 1269,-2155.89 ccw(c1287.11,-2155.89) U34.3@1274.3,-2168.7 ; U34.2@1263.7,-2129.3 cw(c1250.89,-2142.11) 1269,-2142.11 cw(c1287.11,-2142.11) U34.2@1274.3,-2129.3 ; U34.3 U34.3@1266,-2171 ; U34.2 1269,-2168 U34.3@1266,-2171
NetR137_1: R137.1 R218.1 U34.1 | length 322.2
  Top Layer w12: U34.1 1318,-2074 1334,-2058 R137.1 1335,-1984 R218.1 ; U34.1@1288.6,-2078.6 cw(c1299.69,-2089.69) 1299.69,-2074 cw(c1299.69,-2058.31) U34.1@1288.6,-2069.4 ; R137.1@1328.5,-1993.45 cw(c1315.22,-2006.73) 1334,-2006.73 cw(c1352.78,-2006.73) R137.1@1339.5,-1993.45 ; R137.1@1328.5,-1976.55 ccw(c1312.8,-1960.85) 1335,-1960.85 ; R218.1@1329.5,-1929.45 cw(c1316.22,-1942.73) 1335,-1942.73 cw(c1353.78,-1942.73) R218.1@1340.5,-1929.45 ; 1335,-1965.68 ccw(c1350.37,-1965.68) R137.1@1339.5,-1976.55
PWM_A1: R7.1 U3.10 | length 991.9
  Top Layer w8: U3.10 1939.48,-1553.52 v1(1956,-1537) ; v1@1950,-1537 cw(c1935.51,-1537) 1945.76,-1547.24 cw(c1956,-1557.49) v1@1956,-1543
  Top Layer w15: R7.1@1507.51,-897.44 cw(c1482.19,-922.76) 1518,-922.76 ; R7.1@1520.5,-894.5 1518,-892 1518,-1022 1520.5,-1024.5 1611.5,-1115.5 ; 1603,-1107 1611.5,-1115.5 ; v1(1681,-1185) 1611.5,-1115.5
  Bottom Layer w15: v1(1681,-1185) 1891,-1395 1891,-1515 1913,-1537 v1(1956,-1537)
PWM_A2: R8.1 U3.11 | length 1035.5
  Top Layer w8: U3.11 1921.17,-1533.83 v1(1944.47,-1510.53) ; v1@1938.47,-1510.53 cw(c1923.98,-1510.53) 1934.22,-1520.78 cw(c1944.47,-1531.02) v1@1944.47,-1516.53
  Top Layer w15: R8.1@1566.51,-898.44 cw(c1531.54,-933.42) 1581,-933.42 ; R8.1@1581,-892 1581,-1034 v1(1663,-1116)
  Bottom Layer w15: v1(1663,-1116) 1955,-1408 1955,-1433 ; v1(1944.47,-1510.53) 1955,-1500 1955,-1433 ; 1955,-1498 1955,-1433 ; v1@1942.7,-1508.76 ccw(c1913,-1479.07) 1955,-1479.07 cw(c1913,-1479.07) v1@1942.7,-1508.76
PWM_B1: R13.1 U3.12 | length 1042.5
  Top Layer w8: v1@1829,-1510 v1(1829.21,-1510.21) U3.12 1913.79,-1510.21 ; v1@1833.45,-1514.45 cw(c1843.7,-1524.7) 1843.7,-1510.21 cw(c1843.7,-1495.73) v1@1833.45,-1505.97 ; U3.12@1870.8,-1513.65 ccw(c1862.51,-1521.94) 1862.51,-1510.21 ccw(c1862.51,-1498.48) U3.12@1870.8,-1506.78 ; U3.12@1907.58,-1513.22 cw(c1913.79,-1518.12) 1913.79,-1510.21 ; U3.12@1907.58,-1507.2 ccw(c1913.79,-1502.3) 1913.79,-1510.21 ; v1@1927.76,-1466.24 cw(c1917.51,-1476.49) 1932,-1476.49 cw(c1946.49,-1476.49) v1@1936.24,-1466.24 ; v1(1932,-1462) 1932,-1492 1913.79,-1510.21
  Top Layer w15: R13.1@1381.56,-898.44 cw(c1370.84,-909.16) 1386,-909.16 cw(c1401.16,-909.16) R13.1@1390.44,-898.44 ; R13.1 1386,-1036 1420.5,-1070.5 1426.53,-1076.53 v1(1527,-1177)
  Bottom Layer w15: v1(1527,-1177) 1829.21,-1479.21 v1(1829.21,-1510.21)
PWM_B2: R6.1 U3.13 | length 831.4
  Top Layer w8: U3.13 v1(1865.75,-1445.25) ; U3.13@1827.47,-1448.69 cw(c1835.77,-1456.98) 1835.77,-1445.25 cw(c1835.77,-1433.52) U3.13@1827.47,-1441.82 ; v1@1861.51,-1449.49 ccw(c1851.26,-1459.74) 1851.26,-1445.25 ccw(c1851.26,-1430.77) v1@1861.51,-1441.01
  Top Layer w15: R6.1@1442.56,-898.44 cw(c1431.84,-909.16) 1447,-909.16 cw(c1462.16,-909.16) R6.1@1451.44,-898.44 ; R6.1 1447,-1015 v1(1610,-1178)
  Bottom Layer w15: v1(1610,-1178) 1865.75,-1433.75 v1(1865.75,-1445.25)
PWR_EN: Q5.1 R1.2 U3.5 | length 635.6
  Top Layer w12: U3.5 1957.94,-1651.95 v1(1958,-1652) ; R1.2@2301.76,-1699.45 cw(c2288.48,-1712.73) 2307.26,-1712.73 cw(c2326.04,-1712.73) R1.2@2312.76,-1699.45 ; R1.2@2301.76,-1682.55 ccw(c2288.48,-1669.27) 2307.26,-1669.27 ccw(c2326.04,-1669.27) R1.2@2312.76,-1682.55 ; Q5.1@2302.89,-1749.89 ccw(c2292.34,-1739.34) 2307.26,-1739.34 ; v1@2303.17,-1650.83 cw(c2293.3,-1660.7) 2307.26,-1660.7 ; v1(2306,-1648) 2307.26,-1649.26 R1.2 2307.26,-1753.74 Q5.1 ; 2307.26,-1740.6 ccw(c2320.4,-1740.6) Q5.1@2311.11,-1749.89
  Bottom Layer w12: v1(1958,-1652) 1962,-1648 v1(2306,-1648) ; v1@1960.83,-1654.83 cw(c1977.31,-1671.31) 1977.31,-1648
RXD1: P4.2 R218.2 U3.31 | length 1516.8
  Top Layer w8: 1374.66,-1844.66 cw(c1342.32,-1877) v1@1388.06,-1877 ; R218.2@1387.14,-1911.13 ccw(c1370.45,-1894.44) 1394.06,-1894.44 ccw(c1417.66,-1894.44) R218.2@1400.97,-1911.13 ; 1388.32,-1858.32 cw(c1369.63,-1877) v1@1396.06,-1877 ; v1@1389.81,-1881.24 cw(c1379.57,-1891.49) 1394.06,-1891.49 cw(c1408.54,-1891.49) v1@1398.3,-1881.24 ; v1@1390.18,-1872.42 ccw(c1383.09,-1864.06) 1394.06,-1864.06 ; R218.2 v1(1394.06,-1877) 1394.06,-1864.06 ; v1@1397.93,-1872.42 cw(c1405.02,-1864.06) 1394.06,-1864.06 ; U3.31 1374.74,-1632.26 1291,-1716 1291,-1761 1394.06,-1864.06
  Bottom Layer w8: P4.2 1217,-2493 1269,-2441 1269,-1913 1305,-1877 v1(1394.06,-1877) ; v1@1389.81,-1881.24 ccw(c1379.57,-1891.49) 1379.57,-1877 ccw(c1379.57,-1862.51) v1@1389.81,-1872.76
SWCLK: P3.2 U3.37 | length 690.4
  Top Layer w8: U3.37@1596.19,-1817.78 cw(c1587.9,-1826.08) 1599.63,-1826.08 cw(c1611.36,-1826.08) U3.37@1603.07,-1817.78 ; v1@1596.76,-1830.76 ccw(c1589.82,-1823.82) 1599.63,-1823.82 ; U3.37@1599.63,-1817.21 ccw(c1618.79,-1817.21) v1@1605.24,-1830.76 ; U3.37 1599.63,-1833.63 v1(1601,-1835)
  Bottom Layer w8: P3.2 1542,-1678 1601,-1737 v1(1601,-1835) ; v1@1596.76,-1830.76 ccw(c1586.51,-1820.51) 1601,-1820.51 ccw(c1615.49,-1820.51) v1@1605.24,-1830.76
SWD: P3.4 U3.34 | length 631.6
  Top Layer w8: v1(1462,-1652) 1462,-1658 1495.31,-1691.31 U3.34 ; v1@1468,-1652 ccw(c1496.97,-1652) 1476.49,-1672.49
  Bottom Layer w8: P3.4 1446,-1478 1462,-1494 v1(1462,-1652) ; v1@1457.76,-1647.76 ccw(c1447.51,-1637.51) 1462,-1637.51 ccw(c1476.49,-1637.51) v1@1466.24,-1647.76
T_A: C2.1 C10.1 R3.1 U3.18 | length 1002
  Top Layer w8: R3.1@1199.08,-1025.92 cw(c1182.39,-1042.61) 1206,-1042.61 cw(c1229.61,-1042.61) R3.1@1212.92,-1025.92 ; C10.1@1201.08,-1126.13 ccw(c1184.39,-1109.44) 1208,-1109.44 ccw(c1231.61,-1109.44) C10.1@1214.92,-1126.13 ; C2.1@1201.08,-1085.87 cw(c1184.39,-1102.56) 1208,-1102.56 cw(c1231.61,-1102.56) C2.1@1214.92,-1085.87 ; C2.1@1201.08,-1066.13 ccw(c1189.22,-1054.27) 1206,-1054.27 ; 1206,-1044.61 ccw(c1236.44,-1044.61) C2.1@1214.92,-1066.13 ; R3.1 1206,-1074 C2.1 C10.1@1208,-1135 ; C10.1 1232,-1160 1232,-1222 1310,-1300 1676.68,-1300 1721.68,-1345 U3.18
T_B: C10.2 C13.1 R4.1 U3.17 | length 1022
  Top Layer w8: C10.2@1260.14,-1126.13 ccw(c1236.34,-1102.33) 1270,-1102.33 ; C13.1@1263.08,-1085.87 cw(c1246.39,-1102.56) 1270,-1102.56 cw(c1293.61,-1102.56) C13.1@1276.92,-1085.87 ; C13.1@1263.08,-1066.13 ccw(c1239.15,-1042.19) 1273,-1042.19 ; R4.1@1266.08,-1024.92 cw(c1249.39,-1041.61) 1273,-1041.61 cw(c1296.61,-1041.61) R4.1@1279.92,-1024.92 ; 1270,-1116.55 ccw(c1283.56,-1116.55) C10.2@1273.97,-1126.13 ; C13.1 C13.1@1270,-1090 ; 1273,-1056.68 ccw(c1286.37,-1056.68) C13.1@1276.92,-1066.13 ; R4.1 1273,-1087 C13.1@1270,-1090 ; U3.17 1741.36,-1341 1686.36,-1286 1319,-1286 1245,-1212 1245,-1158.06 C10.2 1270,-1133.06 C13.1@1270,-1090
TXD1: P4.3 R31.2 U3.30 | length 1367.3
  Top Layer w8: R31.2@1096.47,-2120.13 ccw(c1083.43,-2130.8) 1083.43,-2113.94 ; R31.2@1096.47,-2107.76 cw(c1083.43,-2097.09) 1083.43,-2113.94 ; R31.2@1100.08,-2107.03 ccw(c1083.39,-2090.34) 1107,-2090.34 ccw(c1130.61,-2090.34) R31.2@1113.92,-2107.03 ; v1@1102.76,-2012.24 cw(c1092.51,-2022.49) 1107,-2022.49 cw(c1121.49,-2022.49) v1@1111.24,-2012.24 ; v1(1107,-2008) R31.2 1083.43,-2113.94 ; P4.3 1080,-2393 1056.37,-2369.37 1056.37,-2141 1083.43,-2113.94 ; v1@1194.76,-2003.76 ccw(c1184.51,-1993.51) 1199,-1993.51 ccw(c1213.49,-1993.51) v1@1203.24,-2003.76 ; v1(1199,-2008) 1199,-1765 1351.42,-1612.57 U3.30
  Bottom Layer w8: v1(1107,-2008) v1(1199,-2008) ; v1@1111.24,-2012.24 cw(c1121.49,-2022.49) 1121.49,-2008 cw(c1121.49,-1993.51) v1@1111.24,-2003.76 ; v1@1194.76,-2012.24 ccw(c1184.51,-2022.49) 1184.51,-2008 ccw(c1184.51,-1993.51) v1@1194.76,-2003.76
U1: C6.1 C12.2 C14.1 R14.2 R15.1 R20.2 | length 938.8
  Top Layer w12: C6.1 1938.94,-1289 R20.2 1939,-1248 2037,-1150 C14.1 2038,-1044 R15.1 2033.94,-979.94 R14.2 C12.2 ; C6.1@1888.45,-1294.5 cw(c1901.73,-1307.78) 1901.73,-1289 cw(c1901.73,-1270.22) C6.1@1888.45,-1283.5 ; 1917.13,-1289 ccw(c1917.13,-1270.03) R20.2@1930.55,-1283.44 ; 1917.4,-1289 cw(c1917.4,-1307.59) R20.2@1930.55,-1294.45 ; R20.2@1933.5,-1283.44 ccw(c1920.22,-1270.16) 1939,-1270.16 ccw(c1957.78,-1270.16) R20.2@1944.5,-1283.44 ; R14.2@2028.44,-855.45 cw(c2015.16,-868.73) 2033.94,-868.73 cw(c2052.73,-868.73) R14.2@2039.45,-855.45 ; R14.2@2028.44,-838.55 ccw(c2015.16,-825.27) 2033.94,-825.27 ccw(c2052.73,-825.27) R14.2@2039.45,-838.55 ; C12.2@2028.44,-751.45 cw(c2015.16,-764.73) 2033.94,-764.73 cw(c2052.73,-764.73) C12.2@2039.45,-751.45 ; C14.1@2031.5,-1053.45 cw(c2018.22,-1066.73) 2037,-1066.73 cw(c2055.78,-1066.73) C14.1@2042.5,-1053.45 ; C14.1@2031.5,-1036.55 ccw(c2015.8,-1020.85) 2038,-1020.85 ; R15.1@2032.5,-992.45 cw(c2019.22,-1005.73) 2038,-1005.73 cw(c2056.78,-1005.73) R15.1@2043.5,-992.45 ; 2033.94,-952.48 ccw(c2066.57,-952.48) R15.1@2043.5,-975.55 ; 2038,-1025.68 ccw(c2053.37,-1025.68) C14.1@2042.5,-1036.55
U2: R14.1 R23.2 X1.3 | length 756.3
  Top Layer w12: R14.1 v1(2151,-847) ; R14.1@2098.5,-852.5 cw(c2111.78,-865.78) 2111.78,-847 cw(c2111.78,-828.22) R14.1@2098.5,-841.5 ; v1@2152.1,-847 ccw(c2152.1,-790.23) X1.3@2192.24,-830.37 ; 2177.44,-847 cw(c2177.44,-877.12) X1.3@2200.11,-857.29 ; R23.2@2179.5,-1285.44 ccw(c2166.22,-1272.16) 2185,-1272.16 ccw(c2203.78,-1272.16) R23.2@2190.5,-1285.44 ; R23.2 v1(2185,-1256) ; X1.3@2191.08,-865.19 ccw(c2151,-900.24) v1(2151,-847) ; X1.3 2208.87,-847 v1(2151,-847)
  Bottom Layer w12: v1(2151,-847) 2192,-888 2192,-1249 v1(2185,-1256)
VCC: D5.1 P1.1 P4.1 | length 1315.5
  Top Layer w40: P1.1 2005,-2620 2045,-2580 D5.1 ; D5.1@2185.3,-2593.7 ccw(c2152.24,-2626.76) 2152.24,-2580 ccw(c2152.24,-2533.24) D5.1@2185.3,-2566.3
  Bottom Layer w40: P4.1 1285,-2593 1394,-2484 1851,-2484 1900,-2533 P1.1
VCC_3.3V: C4.2 C5.2 C7.2 C26.2 C56.1 P3.1 Q5.2 R1.1 R5.1 R27.2 U3.1 U3.9 U3.24 U3.36 U3.48 U5.5 | length 3743.7
  Top Layer w12: C5.2 1425.43,-1734.62 v1(1478,-1734.62) U3.36 ; C5.2@1430.56,-1740.5 cw(c1444.75,-1754.69) 1444.75,-1734.62 ; C5.2@1430.56,-1729.5 ccw(c1442.92,-1717.13) 1442.92,-1734.62 ; 1775.79,-1722 1781.39,-1727.61 ; U3.48 v2(1870,-1799.58) 1999.42,-1799.58 2013,-1786 2013,-1741.06 C7.2 ; v2@1863.64,-1805.95 ccw(c1848.27,-1821.31) 1848.27,-1799.58 ccw(c1848.27,-1777.86) v2@1863.64,-1793.22 ; v2@1876.36,-1805.95 cw(c1891.73,-1821.31) 1891.73,-1799.58 cw(c1891.73,-1777.86) v2@1876.36,-1793.22 ; 1985.89,-1734.62 cw(c1985.89,-1765.1) C7.2@2007.44,-1743.55 ; C7.2@2007.44,-1749.45 cw(c1994.03,-1762.87) 2013,-1762.87 ; C4.2@2010.44,-1567.5 ccw(c1997.16,-1580.78) 1997.16,-1562 ccw(c1997.16,-1543.22) C4.2@2010.44,-1556.5 ; C7.2@2012.94,-1742.27 ccw(c2012.94,-1714.65) 2032.48,-1734.18 ; C7.2@2012.94,-1730.27 ccw(c2012.94,-1673.68) 2052.96,-1713.69 ; 2013,-1762.6 cw(c2031.59,-1762.6) C7.2@2018.45,-1749.45 ; C4.2 1969,-1562 1957.8,-1573.2 U3.9 1812.8,-1573.2 1781.39,-1604.61 1781.39,-1727.61 ; 2051.15,-1715.5 ccw(c2019.61,-1683.95) R5.1@2064.22,-1683.95 ; R5.1 2072,-1694.65 2025.65,-1741 C7.2 ; 1781.39,-1727.61 1788.41,-1734.62 U3.1 2006.57,-1734.62 C7.2
  Top Layer w20: R27.2 1591,-1464 1599.63,-1472.63 ; U3.36 1570.38,-1734.62 1583,-1722 1660,-1722 ; U3.24@1598.49,-1460.02 ccw(c1626.18,-1460.02) 1606.6,-1479.6 ; U3.24 1599.63,-1472.63 ; 1775.79,-1722 1660,-1722 ; 1788.41,-1734.62 1824.04,-1770.25 U3.48 ; 1815.69,-1761.9 cw(c1792.77,-1784.82) U3.48@1825.18,-1784.82 ; C26.2 2217.94,-1869.06 2254.26,-1832.74 Q5.2 2445.26,-1832.74 2459,-1819 2459,-1716 2434,-1691 R1.1 ; 1599.63,-1472.63 1660,-1533 1660,-1722
  Top Layer w30: U5.5 2217.94,-2088.94 C26.2
  Bottom Layer w20: P3.1 1433.62,-1778 v1@1477,-1734.62 ; P3.1@1146.81,-1791.81 cw(c1180.14,-1825.14) 1180.14,-1778 cw(c1180.14,-1730.86) P3.1@1146.81,-1764.19
  Bottom Layer w30: v2(1870,-1799.58) 1870,-1868 1915,-1913 v2(2218,-1913)
VCC_3.3V_E: C1.2 C8.1 C18.1 C25.2 C89.2 C90.2 F7.1 FB6.2 R11.2 U1.5 U4.1 U4.4 X1.4 | length 3776.3
  Top Layer w12: C1.2 1631.06,-837 U4.1 ; C1.2@1636.45,-828.44 ccw(c1657.11,-807.79) 1657.11,-837 ; U4.1@1700.08,-841.11 ccw(c1690.16,-851.03) 1690.16,-837 ccw(c1690.16,-822.97) U4.1@1700.08,-832.89 ; U4.1@1712.94,-833.94 U4.1 ; U4.1@1731.92,-841.11 cw(c1741.84,-851.03) 1741.84,-837 cw(c1741.84,-822.97) U4.1@1731.92,-832.89 ; 1790.58,-911 cw(c1790.58,-927.77) U4.4@1802.44,-915.91 ; 1794.46,-911 ccw(c1794.46,-899.71) U4.4@1802.44,-907.69 ; U4.4@1834.28,-915.91 cw(c1846.14,-927.77) 1846.14,-911 ; U4.4@1834.28,-907.69 ccw(c1842.26,-899.71) 1842.26,-911 ; 1878.44,-911 cw(c1878.44,-936.61) C18.1@1896.55,-918.5 ; 1888.09,-911 ccw(c1888.09,-899.05) C18.1@1896.55,-907.5 ; C18.1 1903,-911 v1(1862,-911) 1819.17,-911 U4.4 1817.56,-911 1786,-911 1767,-892 1767,-846 1758,-837 U4.1 ; U1.5 2119.54,-1297.41 C25.2 2126,-1071 v1(2129,-1068) 2203.27,-1068 X1.4 ; U1.5@2088.66,-1297.41 ccw(c2088.66,-1256.56) C25.2@2117.55,-1285.44 ; C25.2@2120.5,-1285.44 ccw(c2107.22,-1272.16) 2126,-1272.16 ccw(c2144.78,-1272.16) C25.2@2131.5,-1285.44 ; 2126,-1084.9 cw(c2145.9,-1084.9) v1@2131.83,-1070.83
  Top Layer w20: 1103,-1005 ccw(c1125.86,-982.14) R11.2@1134.08,-1013.4 ; v1(1110,-895) 1093,-912 1093,-995 1115.06,-1017.06 R11.2
  Top Layer w40: FB6.2 1785.23,-1992.26 ; 1785.23,-1994.26 2063.74,-1994.26 2128,-1930 2128,-1736 2162,-1702 F7.1 2218,-1678 2324,-1572 C8.1 2324,-1220 2210.27,-1106.27 ; 2144.09,-1719.91 cw(c2188.09,-1763.92) F7.1@2188.09,-1701.68
  Bottom Layer w20: v1(1110,-895) 1133.83,-918.83 1631,-918.83 1666.83,-883 1834,-883 v1(1862,-911) 2079,-911 2129,-961 v1(2129,-1068)
pads on no net: U3.2 U3.3 U3.4 U3.6 U3.14 U3.15 U3.19 U3.21 U3.22 U3.25 U3.28 U3.32 U3.33 U3.38 U3.39 U3.40 U3.41 U3.42 U3.43 U3.45 U3.46 X1.1

## Polygon pours and split planes (outlines as drawn)
AGND on Bottom Layer "Top Layer-No Net" (solid, remove dead copper, pour order 1000): 939,-758 943,-762 1486,-762 2545,-762 2548,-765 2598,-815 2598,-2750 858,-2750 807,-2699 939,-2567 939,-758
AGND on Top Layer "Top Layer-No Net" (solid, remove dead copper, pour order 1001): 939,-758 943,-762 1486,-762 2545,-762 2548,-765 2598,-815 2598,-2750 858,-2750 807,-2699 939,-2567 939,-758

## Keep-outs
Keep-Out Layer:
  lines w5: 983,-2638 983,-437 1013,-407 1017.95,-402.05 2512.05,-402.05 2548,-438 2548,-2637 2510,-2675 1020,-2675 983,-2638

## Silkscreen, mask and mechanical layers (free items; w line width, h text height)
Top Overlay:
  lines w5: 1056.37,-2679 1056.37,-395.53 ; 1213.85,-730.18 1213.85,-690.81 ; 1331.96,-730.18 1331.96,-690.81 ; 1705.98,-730.18 1705.98,-690.81 ; 1824.09,-730.18 1824.09,-690.81 ; 2198.1,-730.18 2198.1,-690.81 ; 2316.21,-730.18 2316.21,-690.81 ; 2473.69,-2679 2473.69,-395.53 ; 1174.48,-690.81 1174.48,-493.96 1371.33,-493.96 1371.33,-690.81 1174.48,-690.81 ; 1666.61,-690.81 1666.61,-493.96 1863.46,-493.96 1863.46,-690.81 1666.61,-690.81 ; 2158.73,-690.81 2158.73,-493.96 2355.58,-493.96 2355.58,-690.81 2158.73,-690.81
Bottom Overlay:
  text "SWD" at 1301,-1494 h30
  text "GND" at 1301,-1592 h30
  text "SWCLK" at 1348,-1691 h30
  text "3.3V" at 1323,-1798 h30
  text "GND" at 1295,-2303 h30
  text "TXD1" at 1306,-2404 h30
  text "GND" at 1610,-2458 h30 r90
  text "5V" at 1923,-2485 h30 r90
  text "B" at 1725,-2501 h30 r90
  text "A" at 1824,-2504 h30 r90
  text "RXD1" at 1303,-2519 h30
  text "5V" at 1280,-2619 h30
Mechanical 1:
  lines w5: 977.63,-2639.63 977.63,-434.9 ; 977.63,-2639.63 1017,-2679 ; 977.63,-2639.63 1017,-2679 ; 977.63,-2639.63 977.63,-434.9 ; 977.63,-434.9 1017,-395.53 ; 977.63,-434.9 1017,-395.53 ; 1017,-2679 2513.06,-2679 ; 1017,-2679 2513.06,-2679 ; 1017,-395.53 1338,-395.53 1017,-395.53 ; 2513.06,-2679 2552.43,-2639.63 ; 2513.06,-2679 2552.43,-2639.63 ; 2513.06,-395.53 2552.43,-434.9 ; 2513.06,-395.53 2316.21,-395.53 2513.06,-395.53 ; 2513.06,-395.53 2552.43,-434.9 ; 2552.43,-2639.63 2552.43,-434.9 ; 2552.43,-2639.63 2552.43,-434.9 ; 1331.96,-395.53 1840,-395.53 1331.96,-395.53 ; 1824.09,-395.53 2336,-395.53 1824.09,-395.53
Mechanical 7:
  circle w2.5: c10233.85,-3151.18 r1.25
  circle w2.5: c11808.65,-3151.18 r1.25
  circle w2.5: c10273.22,-3190.55 r1.25
Mechanical 12:
  circle w5: c11021.25,-3033.07 r29.53
  circle w5: c11121.25,-3033.07 r29.53
  circle w5: c11221.25,-3033.07 r29.53
  circle w5: c11321.25,-3033.07 r29.53
  circle w5: c10921.25,-3033.07 r29.53
  circle w5: c10821.25,-3033.07 r29.53
  circle w5: c10721.25,-3033.07 r29.53